# Altium PCB MultiStage_Cascade_SOT343.PcbDoc
Units mm, origin at the board's own origin, x right, y up, seen from the top; angles counter-clockwise.
Board outline 152.4 x 101.6 mm, 2 copper layers (Top Layer, Bottom Layer); 23 components, 10 nets, 56 pads, 6 vias.
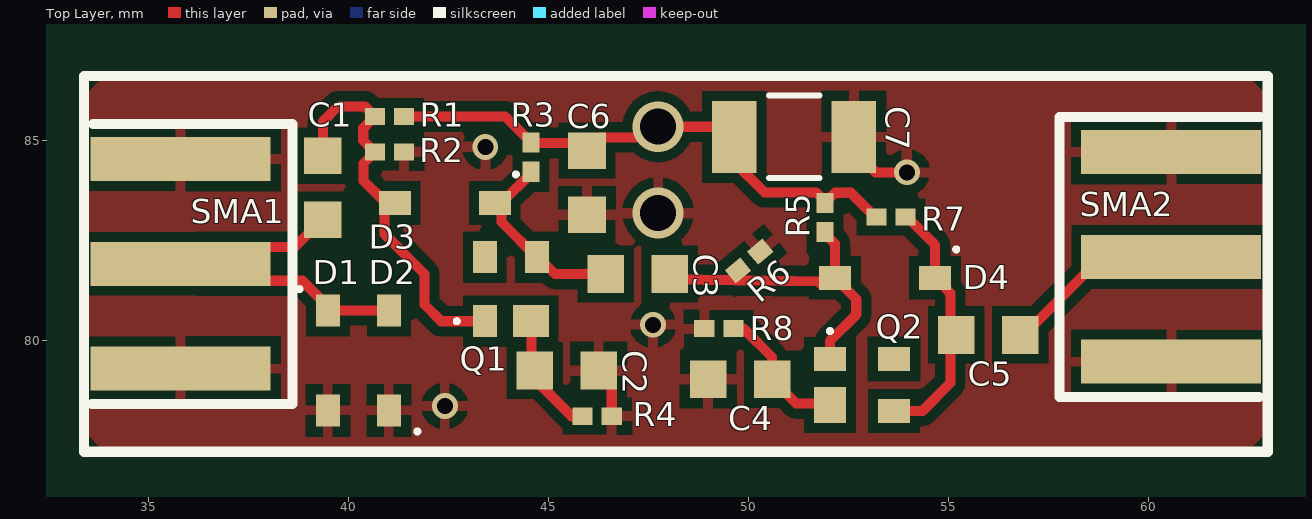
[diagram p0: Top Layer view]
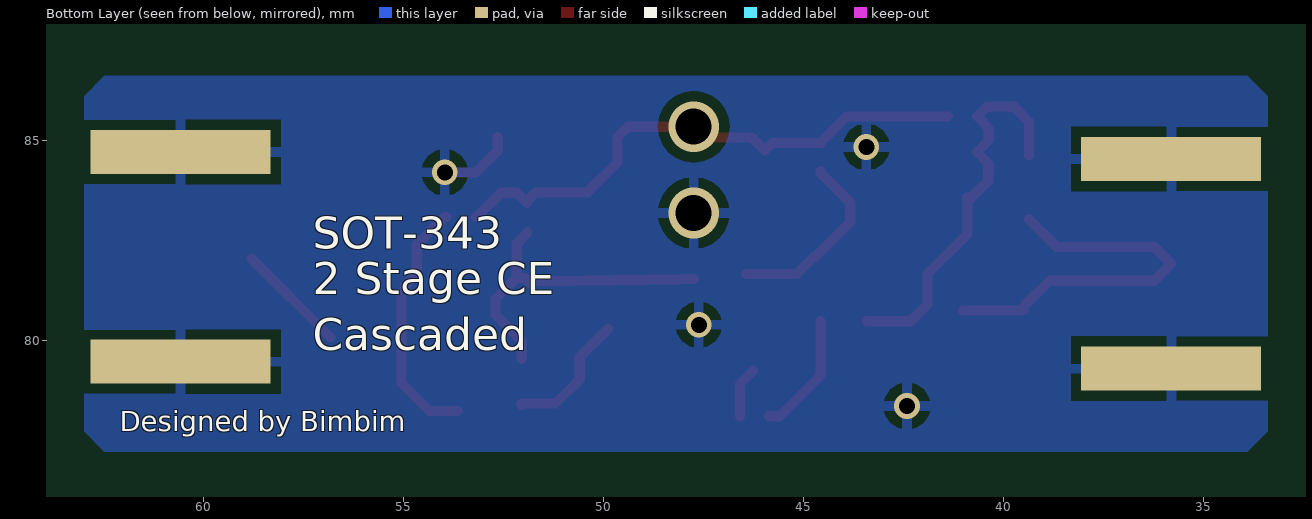
[diagram p1: Bottom Layer view, seen from below]

## Layer stack, top to bottom
Top Solder: solder mask 0.0102, Solder Resist, Dk 3.5
Top Layer: signal copper 0.0356
Dielectric 1: dielectric 0.32, FR-4, Dk 4.8
Bottom Layer: signal copper 0.0356
Bottom Solder: solder mask 0.0102, Solder Resist, Dk 3.5

## Board outline
25.4,25.4 177.8,25.4 177.8,127 25.4,127

## Design rules (kind name [scope] priority, off if disabled: settings)
Clearance [All] p1: gap=0.254 ignorepadtopadclearanceinfootprint=FALSE except(0: Arc-Hole Track-Hole SMDPad-Hole THPad-Hole Via-Hole Fill-Hole Poly-Hole Region-Hole Text-Hole)
PolygonConnect [All] p1: connectstyle=Relief reliefconductorwidth=0.254 reliefentries=4 polygonreliefangle="90 Angle" airgapwidth=0.254
RoomDefinition MultiStage_Cascade_SOT343 [InComponentClass('MultiStage_Cascade_SOT343')] p1: confinementstyle=ConfineIn formatcopy=TRUE lockcomponents=FALSE outline 9.398,61.849 311.912,61.849 311.912,109.601 9.398,109.601
RoutingVias [All] p1: holewidth=0.711 width=1.27 viastyle="Through Hole" minholewidth=0.711 minwidth=1.27 maxholewidth=0.711 maxwidth=1.27
SolderMaskExpansion [All] p1: expansion=0.102
Width [All] p1: maxlimit=0.254 minlimit=0.254 preferedwidth=0.254
30 further rules are at their usual default settings.

## Classes and differential pairs
component class MultiStage_Cascade_SOT343: C1 C2 C3 C4 C5 D1 D2 D3 D4 Q1 Q2 R1 R2 R3 R4 R5 R6 R7 R8 SMA1 SMA2

## Components (designator, comment, footprint, x,y, rotation, side; value= is the part's Value field where it differs from the comment)
C1 "" CAP_K1 39.37,83.82 r90 top value=Value
C2 "" CAP_K1 45.466,79.248 r180 top value=Value
C3 "" CAP_K1 47.244,81.661 r180 top value=Value
C4 "" CAP_K1 49.801,79.025 r0 top value=Value
C5 "" CAP_K1 56.007,80.137 r180 top value=Value
C6 "" CAP_K1 45.974,83.947 r90 top value=Value
C7 "1206" C1206C 51.153,85.09 r180 top value=Value
D1 "" INF-SOD323_V 39.497,79.502 r0 top
D2 "" INF-SOD323_V 41.021,79.502 r180 top
D3 "" INF-SOD323_V 42.418,83.439 r270 top
D4 "" INF-SOD323_V 53.426,81.565 r270 top
Q1 "BFP842ESD" INF-SOT343_V 44.069,81.28 r90 top
Q2 "BFP842ESD" INF-SOT343_V 52.849,78.883 r0 top
R1 "" RES_RC0201_P6XP3 41.036,85.598 r0 top value=Value
R2 "" RES_RC0201_P6XP3 41.036,84.709 r180 top value=Value
R3 "" RES_RC0201_P6XP3 44.577,84.582 r90 top value=Value
R4 "" RES_RC0201_P6XP3 46.228,78.105 r180 top value=Value
R5 "" RES_RC0201_P6XP3 51.922,83.074 r90 top value=Value
R6 "" RES_RC0201_P6XP3 50.027,81.986 r220 top value=Value
R7 "" RES_RC0201_P6XP3 53.573,83.089 r180 top value=Value
R8 "" RES_RC0201_P6XP3 49.27,80.295 r0 top value=Value
SMA1 "SMA_conn" SMA_conn 35.814,81.915 r270 top
SMA2 "SMA_conn" SMA_conn 60.579,82.089 r90 top

## Footprints (in the part's own frame and the unit in brackets; to place one, negate y for a bottom-side part, rotate by r counter-clockwise, add the part's x,y. Pads: shape width x height; smd on the part's side, far side on the other; paste and mask are expansions set on the pad)
C1206C [mil]
  rect 43.78x71 smd paste+0 mask+0: 1(-58.89,0) 2(58.89,0)
  silkscreen extent -25,-40 25,40, body extent 0,0 10,10, height 10
CAP_K1 [mil]
  rect 36x37 smd paste+0 mask+0: 1(-31.5,0) 2(31.5,0)
  body extent 0,0 10,10, height 10
INF-SOD323_V [mm] "SOD, 2-Leads, Body 1.7x1.25 mm"
  rect 0.6x0.8 smd: 1(0,1.25) 2(0,-1.25)
  silkscreen extent -0.76,1.73 -0.66,1.83, body extent -0.63,-0.85 0.63,0.85, height 1.1
INF-SOT343_V [mm] "SOT343, 4-Leads, Body 2x1.25 mm"
  rect 0.8x0.6 smd: 1(-0.8,0.65) 3(0.8,-0.65) 4(0.8,0.65)
  rect 0.8x0.9 smd: 2(-0.8,-0.5)
  silkscreen extent -0.85,1.3 -0.75,1.4, body extent -0.63,-1 0.63,1, height 1
RES_RC0201_P6XP3 [mm]
  rect 0.503x0.43 smd paste+0 mask+0: 1(-0.366,0) 2(0.366,0)
  body extent 0,0 0.25,0.25, height 0.25
SMA_conn [mm]
  rect 1.1x4.5 smd: GND(-2.62,0) GND(2.62,0) SIG(0,0)
  silkscreen extent -3.5,-2.21 3.5,2.79

## Part data
C1 C2 C3 C4 C5 C6: library part ECH-U1C182GX5, "No Description Available", Built_By=EMA_UL_Team, Copyright="Copyright (C) 2018 Accelerated Designs. All rights reserved", Manufacturer_Part_Number=ECH-U1C182GX5, RefDes=RefDes, Type=DEV, Vendor=Panasonic
C7: library part C1206C221KDGACTU, "No Description Available", Built_By=EMA_UL_Team, Copyright="Copyright (C) 2018 Accelerated Designs. All rights reserved", Manufacturer_Part_Number=C1206C221KDGACTU, RefDes=RefDes, Type=DEV, Vendor=Kemet
D1 D2 D3 D4: library part BAT15-03W, "Single Silicon Schottky Diode, 110 mA IF Max, SOD32, Green", Manufacturer=Infineon, Supplier Part Number 1=N/A, ComponentLink1Description="Manufacturer URL", ComponentLink1URL=http://www.infineon.com/, ComponentLink2Description=Datasheet, ComponentLink2URL=http://www.infineon.com/dgdl/bat15series.pdf?folderId=db3a304314dca3890114ff6812070b44&fileId=db3a304314dca3890114ff6b74ca0b48&location=en.Products.RF.RF_Mixer___Detector_Schottky_Diodes.DATASHEET.bat15series.pdf, ComponentLink3Description="Package Specification", ComponentLink3URL=http://www.infineon.com/dgdl/SOD323-Package_Overview.pdf?folderId=db3a30431936bc4b011952aab84f3bbe&fileId=db3a30431936bc4b011952beed653be3, Configuration=Single, CT (typ)="0.26 pF", DatasheetVersion=Jun-2011, Green=yes, Group="RF Mixer", IF (max)="110 mA", Mounting Technology="Surface Mount", PackageDescription="2-Pin Small Outline Diode Package, 1.25 x 1.7 mm Body", PackageReference=SOD323, PartNumber=BAT15-03W, Supplier 1=Mouser, VF (typ)="0.23 V", VR (max)="4 V"
Q1 Q2: "Robust Low Noise Silicon Germanium Bipolar RF Transistor, 3.25 V VCEO, 40 mA IC, 33 dB Gmax, SOT343, Green", Manufacturer=Infineon, ComponentLink1Description="Manufacturer URL", ComponentLink1URL=http://www.infineon.com/, ComponentLink2Description=Datasheet, ComponentLink2URL=http://www.infineon.com/dgdl/Infineon_Robust_WiFi_SiGe_BFP842ESD_Rev1_0.pdf?folderId=db3a30431f848401011fcbf2ab4c04c4&fileId=db3a3043394427e401394df03a3a27c9&location=en.Products.RF.RF_Transistors_.Ultra_Low_Noise_SiGe_C_Transistors_for_use_up_to_12_GHz.DATASHEET.Infineon_Robust_WiFi_SiGe_BFP842ESD_Rev1_0.pdf, ComponentLink3Description="Package Specification", ComponentLink3URL=http://www.infineon.com/dgdl/SOT343-Package_Overview.pdf?folderId=db3a30431936bc4b0119535155343cba&fileId=db3a30431936bc4b0119535a9f393cd3, DatasheetVersion="Rev. 1.0", Gmax (typ)="33 dB", Green=yes, Group="Robust ultra low noise SiGe", Halogen-free=yes, IC (max)="40 mA", Mounting Technology="Surface Mount", NFmin (typ)="0.4 dB", PackageDescription="4-Pin Small Outline Transistor Package, 1.25 x 2 mm Body", PackageReference=SOT343, PartNumber=BFP842ESD, Ptot (max)="120.0 mW", VCEO (max)="3.25 V"
R1 R2 R3 R4 R5 R6 R7 R8: library part RC0201FR-0718KL, "No Description Available", Built_By=EMA_Anthony, Copyright="Copyright (C) 2018 Accelerated Designs. All rights reserved", Manufacturer_Part_Number=RC0201FR-0718KL, RefDes=RefDes, Type=DEV, Vendor=Yageo

## Free pads (board coordinates)
  rect 4.5x1.1 smd far side: GND(35.814,79.295) GND(35.814,84.535) GND(60.579,79.469) GND(60.579,84.709)

## Via types
v1: diameter 0.64, hole 0.4, Top Layer to Bottom Layer, 3 vias
v2: diameter 1.27, hole 0.9, Top Layer to Bottom Layer, 2 vias
v3: diameter 0.65, hole 0.4, Top Layer to Bottom Layer, 1 vias

## Nets (pads, with @x,y where several pads share a name; then routed paths per layer and width w, separated by ;. In a path a pad name is that pad's centre, name@x,y a point inside that pad or via, vN(x,y) a via of type N, cw(c..) or ccw(c..) an arc to the next point about the centre after c; other vN are vias at no path point)
B1: C1.2 D3.2 Q1.1 R1.1 R2.2 | length 9.7
  Top Layer w0.254: C1.2 39.37,85.471 39.751,85.852 40.416,85.852 R1.1 ; R2.2@40.546,84.834 40.38,84.999 40.38,85.308 40.546,85.473 40.546,85.51 R1.1@40.634,85.598 ; R2.2 40.386,84.425 40.386,83.994 40.814,83.566 40.914,83.566 40.914,82.657 41.91,81.661 41.91,80.899 42.329,80.48 Q1.1
B2: C3.1 D4.2 Q2.1 R5.1 R6.2 | length 8.3
  Top Layer w0.254: C3.1@47.752,81.534 48.042,81.53 49.706,81.505 49.73,81.504 D4.2@51.881,81.472 ; D4.2@51.816,81.407 D4.2@51.881,81.472 ; D4.2@51.895,81.472 D4.2@51.881,81.472 ; R5.1 51.922,82.672 52.176,82.418 D4.2 ; Q2.1 52.049,79.989 52.705,80.645 52.705,81.036 D4.2 ; D4.2@51.881,81.472 51.974,81.565 D4.2
C1: C3.2 D3.1 Q1.3 R3.1 | length 4.7
  Top Layer w0.254: R3.1 44.577,84.18 43.836,83.439 43.836,82.963 Q1.3 44.755,82.08 45.174,81.661 C3.2
C2: C5.2 D4.1 Q2.3 R7.1 | length 6.4
  Top Layer w0.254: Q2.3 54.357,78.233 55.059,78.935 55.059,81.182 54.949,81.292 54.949,81.392 54.776,81.565 D4.1 54.676,82.388 53.975,83.089 R7.1
E1: C2.2 Q1.2 R4.2 | length 3.1
  Top Layer w0.254: Q1.2@44.583,80.48 44.583,79.115 45.593,78.105 R4.2
E2: C4.2 Q2.2 R8.2 | length 3.3
  Top Layer w0.254: 49.89,80.295 50.601,79.584 C4.2 51.204,78.422 52.049,78.422 Q2.2
GND: C2.1 C4.1 C6.1 C7.1 D1.2 D2.1 pad.GND R2.1 R4.1 R6.1 R8.1 SMA1.GND SMA2.GND | length 3.2
  Top Layer w0.254: C2.1 46.594,78.92 R4.1 ; C7.1 52.649,84.744 53.192,84.201 v1(53.975,84.201)
  other v1: 47.625,80.391 43.434,84.836
  other v2: 47.752,83.185
  other v3: 42.418,78.359
Vcc: C6.2 C7.2 R1.2 R3.2 R5.2 R7.2 | length 13.8
  Top Layer w0.254: R1.2 43.927,85.598 R3.2@44.452,85.072 ; R3.2 44.577,84.937 45.784,84.937 C6.2 46.304,85.077 47.21,85.077 47.477,85.344 v2(47.752,85.344) 49.403,85.344 C7.2 49.657,84.455 50.411,83.701 51.697,83.701 51.922,83.476 R5.2 52.175,83.693 52.567,83.693 53.171,83.089 R7.2
Vin: C1.1 D1.1 D2.2 SMA1.SIG | length 9.8
  Top Layer w0.254: C1.1 39.357,83.02 38.675,82.338 36.237,82.338 SMA1.SIG 36.237,81.492 38.857,81.492 39.497,80.852 D1.1 D2.2
Vout: C5.1 SMA2.SIG | length 2.8
  Top Layer w0.254: C5.1@56.832,80.073 SMA2.SIG@58.801,82.042
pads on no net: Q1.4 Q2.4

## Polygon pours and split planes (outlines as drawn)
GND on Bottom Layer "Bottom Layer-GND" (solid, remove dead copper, pour order 2): 33.401,86.106 33.909,86.614 62.484,86.614 62.992,86.106 62.992,77.724 62.484,77.216 33.909,77.216 33.401,77.724
GND on Top Layer "Top Layer-GND" (solid, remove dead copper, pour order 0): 33.401,86.106 33.909,86.614 62.484,86.614 62.992,86.106 62.992,77.724 62.484,77.216 33.909,77.216 33.401,77.724

## Silkscreen, mask and mechanical layers (free items; w line width, h text height)
Top Overlay:
  lines w0.254: 33.401,77.216 62.992,77.216 62.992,86.614 33.401,86.614 33.401,77.216
Bottom Overlay:
  text "SOT-343" at 57.277,82.296 h0.8
  text "2 Stage CE" at 57.277,81.153 h0.8
  text "Cascaded" at 57.277,79.756 h0.8
  text "Designed by Bimbim" at 62.103,77.724 h0.5